# Altium PCB Board.PcbDoc (part 2 of 2)
Units mil, origin at the board's own origin, x right, y up, seen from the top; angles counter-clockwise.
Board outline 6771.85 x 2362.21 mil, 2 copper layers (Top Layer, Bottom Layer), stack 61.8 mil thick; 72 components, 58 nets, 281 pads, 84 vias.
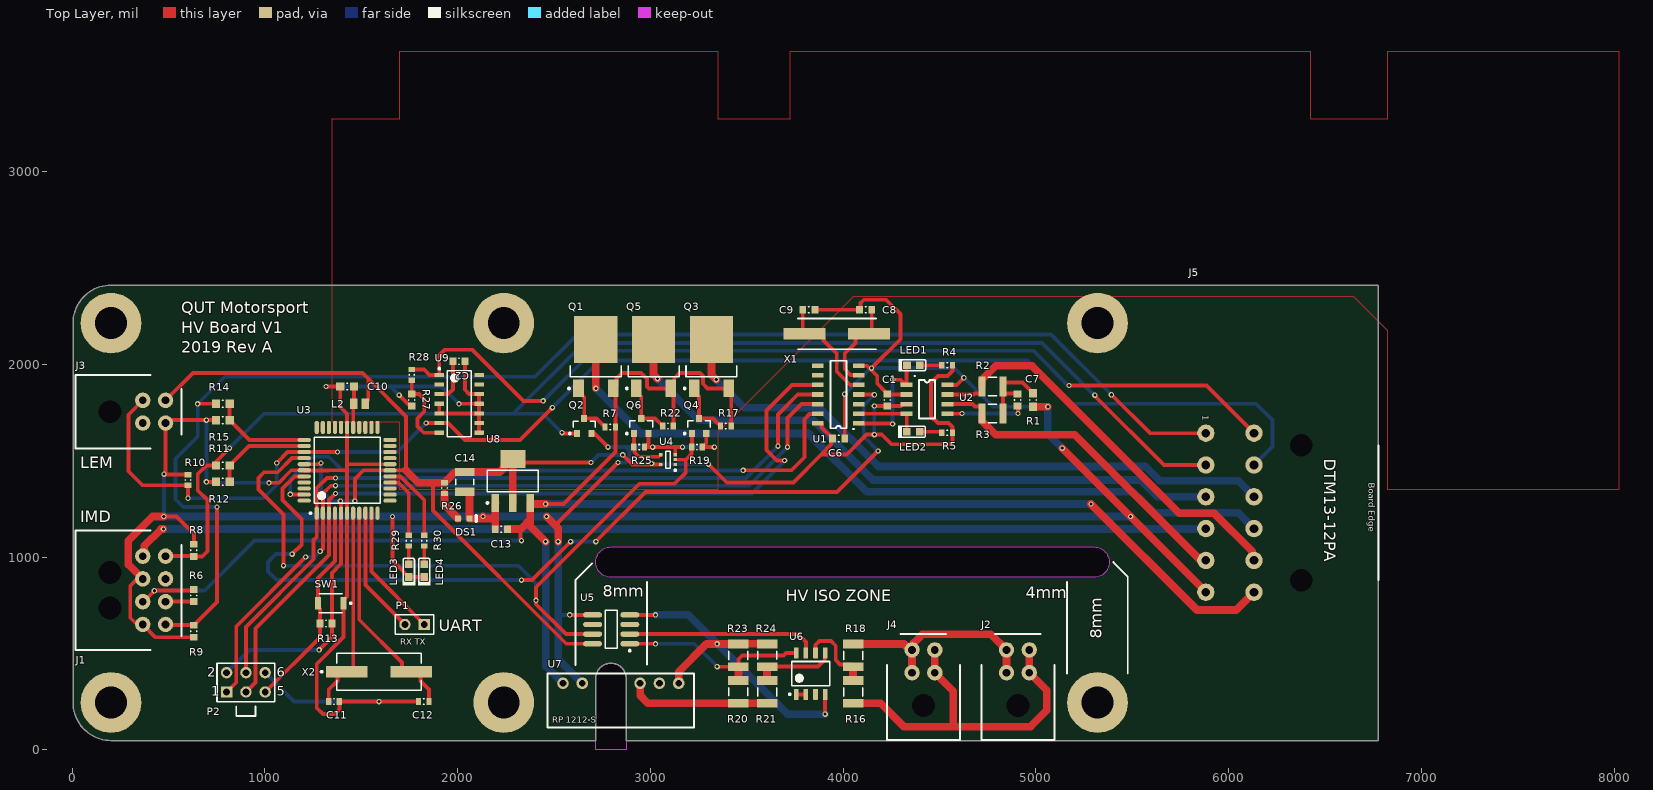
[diagram p0: Top Layer view]

## Via types
v1: diameter 27.56, hole 15.75, Top Layer to Bottom Layer, 84 vias

## Nets (pads, with @x,y where several pads share a name; then routed paths per layer and width w, separated by ;. In a path a pad name is that pad's centre, name@x,y a point inside that pad or via, vN(x,y) a via of type N, cw(c..) or ccw(c..) an arc to the next point about the centre after c; other vN are vias at no path point) (continued)
NetR27_1: (continued)
  Top Layer w20: R28.1 R27.1 1800.35,1846.5 1826.85,1820 1826.85,1754.37 1791.85,1719.37 1791.85,1677.5 1824.35,1645 U9.7
PWR_ONLED: DS1.1 R26.1 | length 159.2
  Top Layer w40: R26.1 1931.85,1270.47 DS1.1
TSAL_HV_LOGIC: U5.2 U6.7 | length 987.8
  Top Layer w20: U5.2 3766.85,600 3806.85,560 U6.7
TSAL_OPAMP_UNUSED: U6.1 U6.2 | length 50
  Top Layer w20: U6.1 U6.2
pads on no net: J1.7 J1.NC J2.NC J3.NC J4.NC J5.NC U1.3 U3.11 U3.12 U3.13 U3.14 U3.19 U3.20 U3.21 U3.22 U3.23 U3.24 U3.25 U3.26 U3.29 U3.30 U3.31 U3.32 U3.33 U3.41 U3.42 U3.44 U4.1 U5.3 U5.6 U6.3 U7.6 U9.2 U9.13 U9.14

## Polygon pours and split planes (outlines as drawn)
+5 on Top Layer "Top Layer-+5" (solid, shelved, pour order 0): 1700,3275 1700,3625 3350,3625 3350,3275 3725,3275 3725,3625 6424.01,3625 6424.01,3275.99 6425,3275 6825,3275 6825,3625 8025,3625 8025,1350 6825,1350 6825,2175.19 6650.19,2350 4050,2350 4050,2347.97 3350,1647.97 3350,1350 1700,1350 1700,1700 1350,1700 1350,3275
GND on Bottom Layer "Bottom Layer-GND" (solid, shelved, pour order 2): 1700,3275 1700,3625 3350,3625 3350,3275 3725,3275 3725,3625 6424.01,3625 6424.01,3275.99 6425,3275 6825,3275 6825,3625 8025,3625 8025,1350 6825,1350 6825,2175.19 6650.19,2350 4050,2350 4050,2347.97 3350,1647.97 3350,1350 1700,1350 1700,1700 1350,1700 1350,3275

## Silkscreen, mask and mechanical layers (free items; w line width, h text height)
Top Overlay:
  lines w10: 851.85,225 851.85,175 951.85,175 951.85,225 ; 2611.85,440 2611.85,880.98 2696.85,965.98 ; 2981.85,442.75 2981.85,870 ; 5161.85,395 5161.85,870 ; 5401.85,973.74 5476.85,898.74 5476.85,395
  text "QUT Motorsport" at 566.85,2265 h60
  text "HV Board V1" at 566.85,2160 h60
  text "2019 Rev A" at 566.85,2060 h60
  text "LEM" at 41.85,1460 h60
  text "IMD" at 41.85,1180 h60
  text "8mm" at 2751.85,795 h60
  text "4mm" at 4946.85,785 h60
  text "HV ISO ZONE" at 3701.85,770 h60
  text "UART" at 1901.85,615 h60
  text "8mm" at 5341.85,575 h60 r90
  text "RX TX" at 1701.85,545 h32
Mechanical 1:
  text "Board Cutout / Slot (4mm)" at 2801.85,945 h60
BoardOutline:
  lines w10: 201.85,48.15 cw(c201.85,245) 5,245 5,2213.5 cw(c201.85,2213.5) 201.85,2410.35 6776.85,2410.35 6776.85,48.15 2874.33,48.15 2874.33,370 ccw(c2795.59,370) 2716.85,370 2716.85,48.15 201.85,48.15 ; 201.85,48.15 201.85,48.15 ; 2795.59,895 cw(c2795.59,973.74) 2795.59,1052.48 5301.85,1052.48 cw(c5301.85,973.74) 5301.85,895 2795.59,895

## Text inside footprints (layer, text, board x,y; h text height)
J5: Top Overlay "Board Edge" at 6726.85,1385 h32 r270; Top Overlay "DTM13-12PA" at 6496.85,1510 h60 r270; Top Overlay "1" at 5866.85,1735 h32 r270
P2: Top Overlay "6" at 1061.85,380 h50; Top Overlay "5" at 1061.85,280 h50; Top Overlay "2" at 701.85,380 h50; Top Overlay "1" at 721.85,280 h50
U7: Top Overlay "RP 1212-S" at 2491.85,140 h32